# Altium PCB SoM.PcbDoc (part 2 of 5)
Units mm, origin at the board's own origin, x right, y up, seen from the top; angles counter-clockwise.
Board outline 69.6 x 50 mm, 8 copper layers ([1] Signal HS-H, [2] GND, [3] Signal HS-V, [4] GND, [5] POWER, [6] Signal H, [7] GND, [8] Signal V), stack 1.601 mm thick; 537 components, 538 nets, 5734 pads, 0 vias.
Unrouted connection lines stored in the file: 2195.
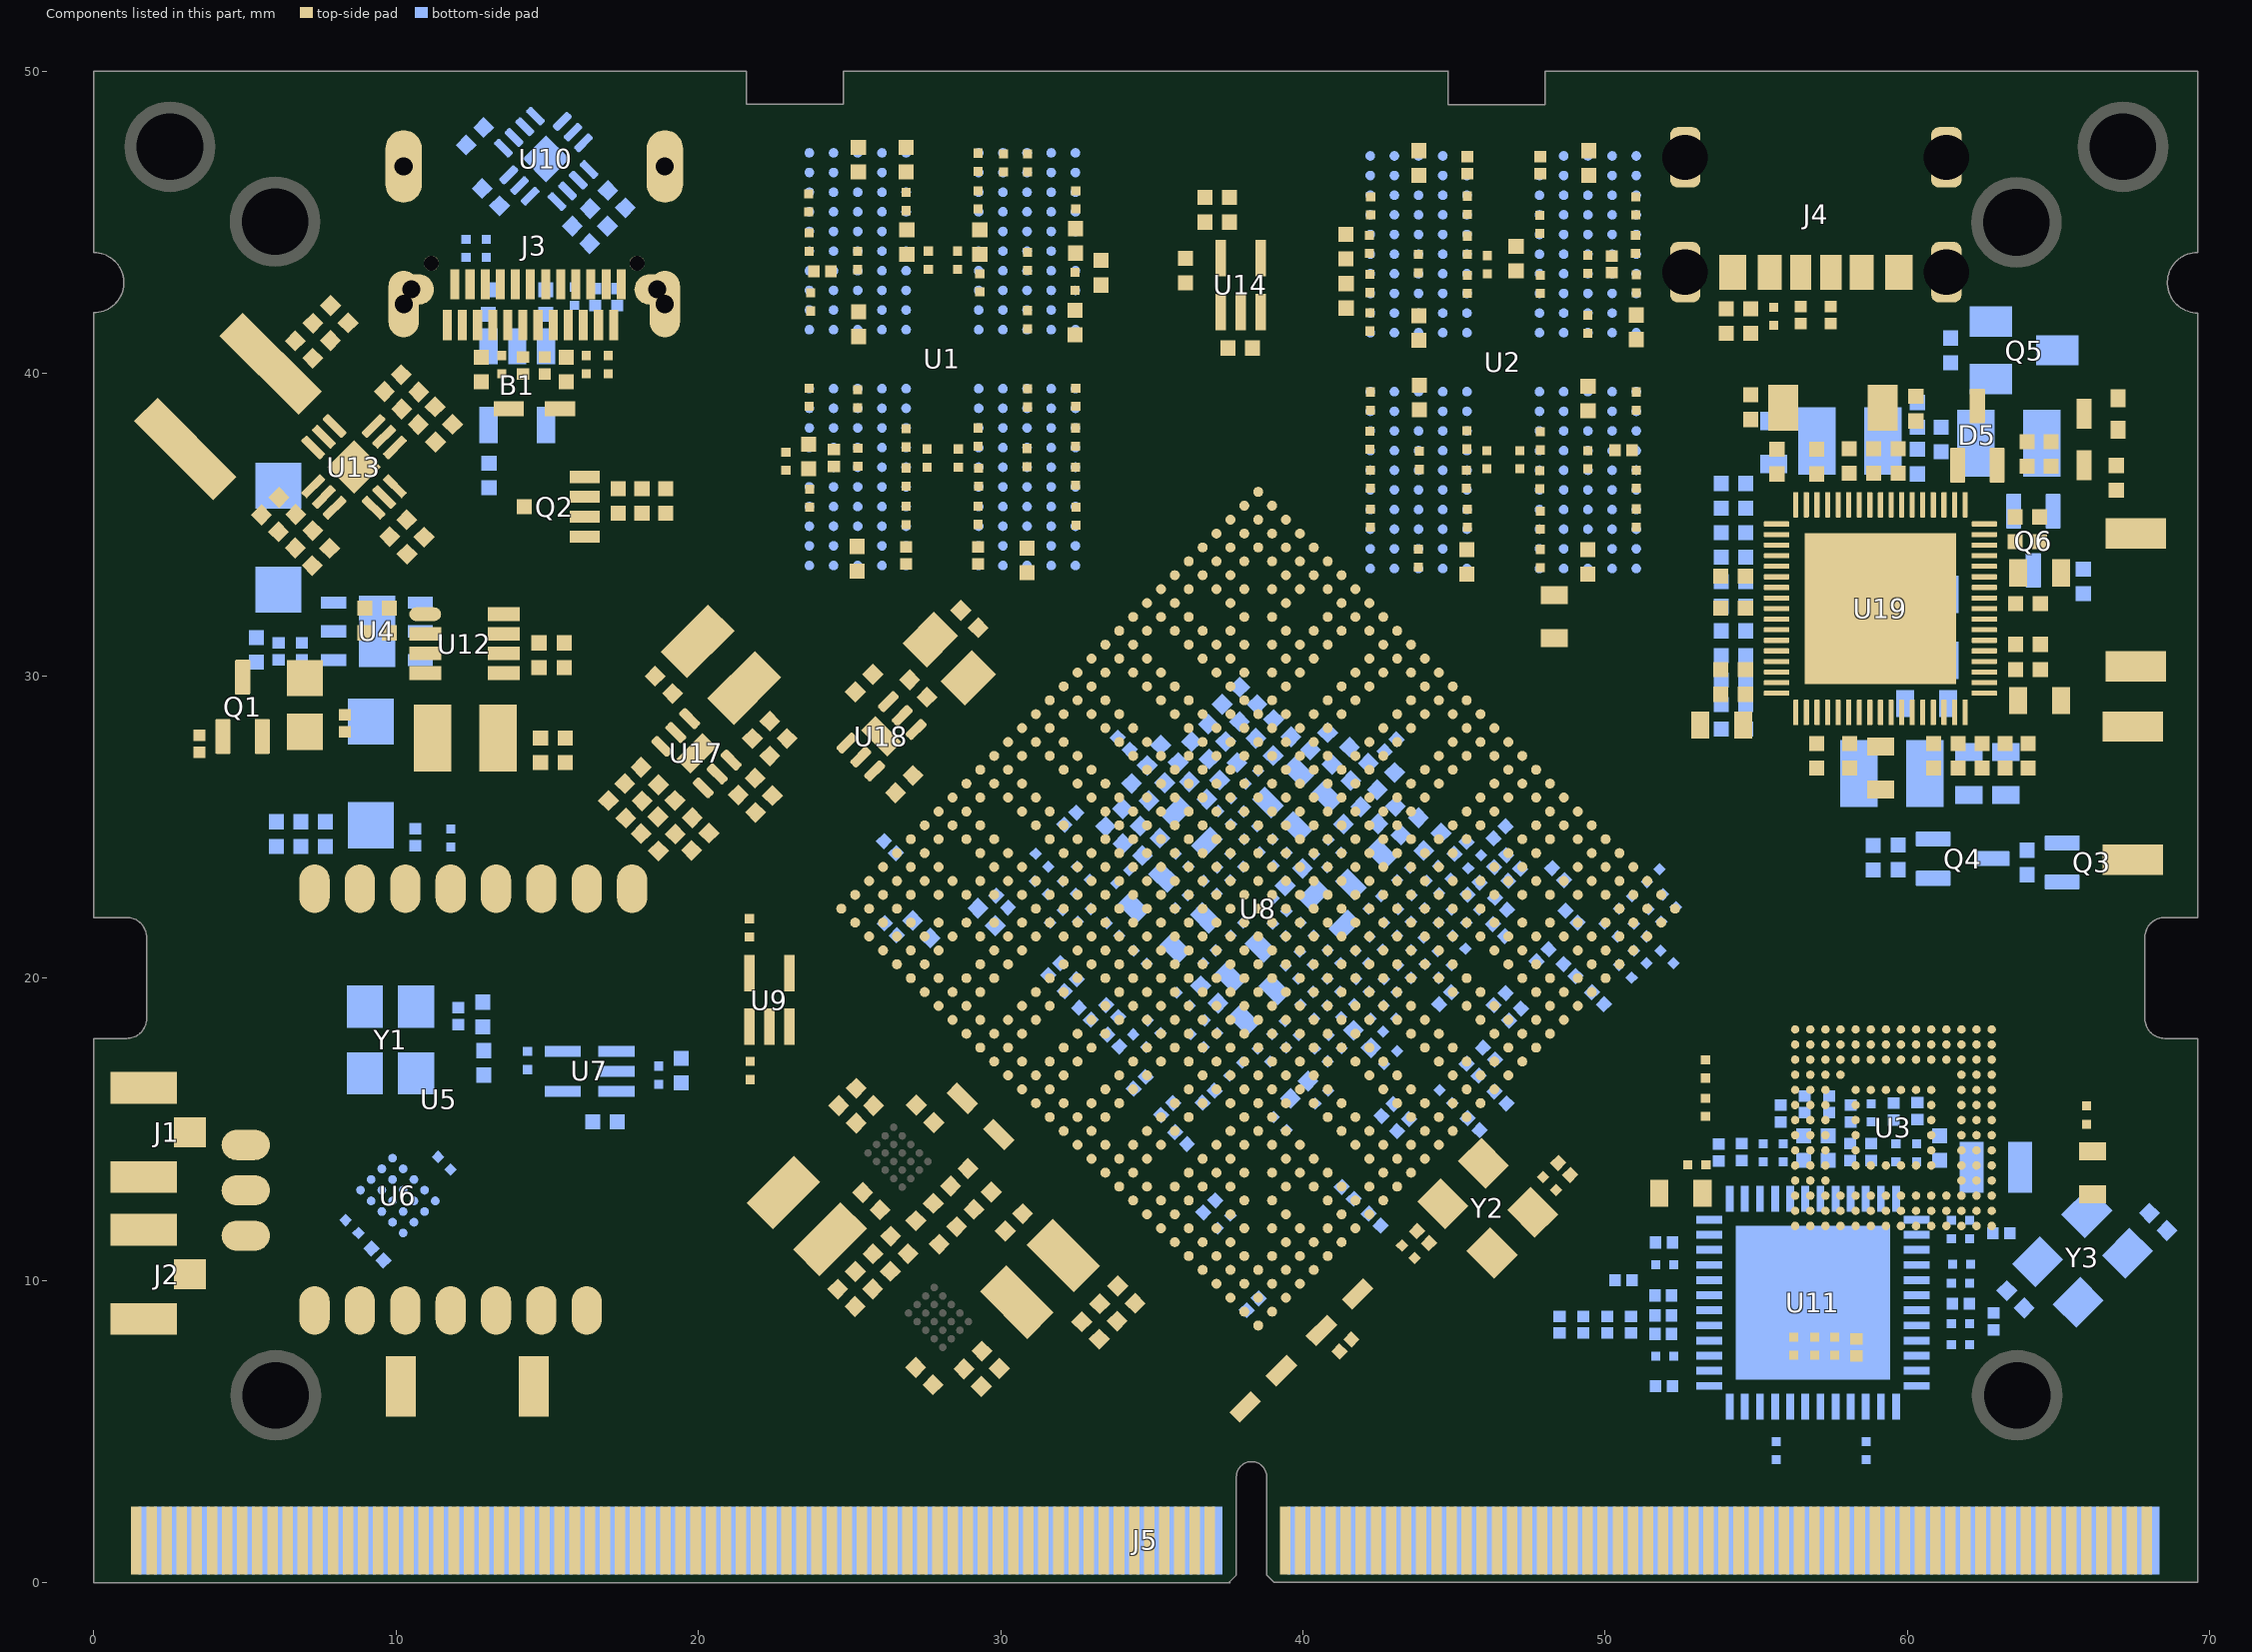
[diagram p8: the components of this part, seen from the top]

## Footprints (in the part's own frame and the unit in brackets; to place one, negate y for a bottom-side part, rotate by r counter-clockwise, add the part's x,y. Pads: shape width x height; smd on the part's side, far side on the other; paste and mask are expansions set on the pad) (continued)
FBGA828_23_826X826 [mm] "RK3399"
  round 0.33 smd: A1(-9.75,9.75) A2(-9.1,9.75) A3(-8.45,9.75) A4(-7.8,9.75) A5(-7.15,9.75) A6(-6.5,9.75) A7(-5.85,9.75) A8(-5.2,9.75) A9(-4.55,9.75) A10(-3.9,9.75) A11(-3.25,9.75) A12(-2.6,9.75) A13(-1.95,9.75) A14(-1.3,9.75) A15(-0.65,9.75) A16(0,9.75) A17(0.65,9.75) A18(1.3,9.75) A19(1.95,9.75) A20(2.6,9.75) A21(3.25,9.75) A22(3.9,9.75) A23(4.55,9.75) A24(5.2,9.75) A25(5.85,9.75) A26(6.5,9.75) A27(7.15,9.75) A28(7.8,9.75) A29(8.45,9.75) A30(9.1,9.75) A31(9.75,9.75) AA1(-9.75,-3.25) AA2(-9.1,-3.25) AA3(-8.45,-3.25) AA4(-7.8,-3.25) AA5(-7.15,-3.25) AA6(-6.5,-3.25) AA7(-5.85,-3.25) AA8(-5.2,-3.25) AA9(-4.55,-3.25) AA10(-3.9,-3.25) AA11(-3.25,-3.25) AA12(-2.6,-3.25) AA13(-1.95,-3.25) AA14(-1.3,-3.25) AA15(-0.65,-3.25) AA16(0,-3.25) AA17(0.65,-3.25) AA18(1.3,-3.25) AA19(1.95,-3.25) AA20(2.6,-3.25) AA21(3.25,-3.25) AA22(3.9,-3.25) AA23(4.55,-3.25) AA24(5.2,-3.25) AA25(5.85,-3.25) AA26(6.5,-3.25) AA27(7.15,-3.25) AA28(7.8,-3.25) AA29(8.45,-3.25) AA30(9.1,-3.25) AA31(9.75,-3.25) AB1(-9.75,-3.9) AB2(-9.1,-3.9) AB8(-5.2,-3.9) AB9(-4.55,-3.9) AB10(-3.9,-3.9) AB11(-3.25,-3.9) AB12(-2.6,-3.9) AB13(-1.95,-3.9) AB14(-1.3,-3.9) AB15(-0.65,-3.9) AB16(0,-3.9) AB17(0.65,-3.9) AB18(1.3,-3.9) AB19(1.95,-3.9) AB20(2.6,-3.9) AB21(3.25,-3.9) AB22(3.9,-3.9) AB23(4.55,-3.9) AB24(5.2,-3.9) AB30(9.1,-3.9) AB31(9.75,-3.9) AC1(-9.75,-4.55) AC2(-9.1,-4.55) AC3(-8.45,-4.55) AC4(-7.8,-4.55) AC5(-7.15,-4.55) AC6(-6.5,-4.55) AC7(-5.85,-4.55) AC8(-5.2,-4.55) AC9(-4.55,-4.55) AC10(-3.9,-4.55) AC11(-3.25,-4.55) AC12(-2.6,-4.55) AC13(-1.95,-4.55) AC14(-1.3,-4.55) AC15(-0.65,-4.55) AC16(0,-4.55) AC17(0.65,-4.55) AC18(1.3,-4.55) AC19(1.95,-4.55) AC20(2.6,-4.55) AC21(3.25,-4.55) AC22(3.9,-4.55) AC23(4.55,-4.55) AC24(5.2,-4.55) AC25(5.85,-4.55) AC26(6.5,-4.55) AC27(7.15,-4.55) AC28(7.8,-4.55) AC29(8.45,-4.55) AC30(9.1,-4.55) AC31(9.75,-4.55) AD1(-9.75,-5.2) AD2(-9.1,-5.2) AD3(-8.45,-5.2) AD4(-7.8,-5.2) AD5(-7.15,-5.2) AD6(-6.5,-5.2) AD7(-5.85,-5.2) AD8(-5.2,-5.2) AD9(-4.55,-5.2) AD10(-3.9,-5.2) AD11(-3.25,-5.2) AD12(-2.6,-5.2) AD13(-1.95,-5.2) AD14(-1.3,-5.2) AD15(-0.65,-5.2) AD16(0,-5.2) AD17(0.65,-5.2) AD18(1.3,-5.2) AD19(1.95,-5.2) AD20(2.6,-5.2) AD21(3.25,-5.2) AD22(3.9,-5.2) AD23(4.55,-5.2) AD24(5.2,-5.2) AD25(5.85,-5.2) AD26(6.5,-5.2) AD27(7.15,-5.2) AD28(7.8,-5.2) AD29(8.45,-5.2) AD30(9.1,-5.2) AD31(9.75,-5.2) AE1(-9.75,-5.85) AE2(-9.1,-5.85) AE5(-7.15,-5.85) AE6(-6.5,-5.85) AE8(-5.2,-5.85) AE9(-4.55,-5.85) AE11(-3.25,-5.85) AE12(-2.6,-5.85) AE14(-1.3,-5.85) AE15(-0.65,-5.85) AE17(0.65,-5.85) AE18(1.3,-5.85) AE20(2.6,-5.85) AE21(3.25,-5.85) AE23(4.55,-5.85) AE24(5.2,-5.85) AE26(6.5,-5.85) AE27(7.15,-5.85) AE30(9.1,-5.85) AE31(9.75,-5.85) AF1(-9.75,-6.5) AF2(-9.1,-6.5) AF3(-8.45,-6.5) AF4(-7.8,-6.5) AF5(-7.15,-6.5) AF7(-5.85,-6.5) AF8(-5.2,-6.5) AF9(-4.55,-6.5) AF11(-3.25,-6.5) AF12(-2.6,-6.5) AF14(-1.3,-6.5) AF15(-0.65,-6.5) AF17(0.65,-6.5) AF18(1.3,-6.5) AF20(2.6,-6.5) AF21(3.25,-6.5) AF23(4.55,-6.5) AF24(5.2,-6.5) AF25(5.85,-6.5) AF27(7.15,-6.5) AF28(7.8,-6.5) AF29(8.45,-6.5) AF30(9.1,-6.5) AF31(9.75,-6.5) AG1(-9.75,-7.15) AG2(-9.1,-7.15) AG3(-8.45,-7.15) AG4(-7.8,-7.15) AG6(-6.5,-7.15) AG7(-5.85,-7.15) AG8(-5.2,-7.15) AG9(-4.55,-7.15) AG11(-3.25,-7.15) AG12(-2.6,-7.15) AG14(-1.3,-7.15) AG15(-0.65,-7.15) AG17(0.65,-7.15) AG18(1.3,-7.15) AG20(2.6,-7.15) AG21(3.25,-7.15) AG23(4.55,-7.15) AG24(5.2,-7.15) AG25(5.85,-7.15) AG26(6.5,-7.15) AG28(7.8,-7.15) AG29(8.45,-7.15) AG30(9.1,-7.15) AG31(9.75,-7.15) AH1(-9.75,-7.8) AH2(-9.1,-7.8) AH3(-8.45,-7.8) AH5(-7.15,-7.8) AH6(-6.5,-7.8) AH8(-5.2,-7.8) AH9(-4.55,-7.8) AH11(-3.25,-7.8) AH12(-2.6,-7.8) AH14(-1.3,-7.8) AH15(-0.65,-7.8) AH17(0.65,-7.8) AH18(1.3,-7.8) AH20(2.6,-7.8) AH21(3.25,-7.8) AH23(4.55,-7.8) AH24(5.2,-7.8) AH26(6.5,-7.8) AH27(7.15,-7.8) AH29(8.45,-7.8) AH30(9.1,-7.8) AH31(9.75,-7.8) AJ1(-9.75,-8.45) AJ2(-9.1,-8.45) AJ3(-8.45,-8.45) AJ4(-7.8,-8.45) AJ5(-7.15,-8.45) AJ6(-6.5,-8.45) AJ8(-5.2,-8.45) AJ9(-4.55,-8.45) AJ11(-3.25,-8.45) AJ12(-2.6,-8.45) AJ14(-1.3,-8.45) AJ15(-0.65,-8.45) AJ17(0.65,-8.45) AJ18(1.3,-8.45) AJ20(2.6,-8.45) AJ21(3.25,-8.45) AJ23(4.55,-8.45) AJ24(5.2,-8.45) AJ26(6.5,-8.45) AJ27(7.15,-8.45) AJ28(7.8,-8.45) AJ29(8.45,-8.45) AJ30(9.1,-8.45) AJ31(9.75,-8.45) AK1(-9.75,-9.1) AK2(-9.1,-9.1) AK3(-8.45,-9.1) AK4(-7.8,-9.1) AK5(-7.15,-9.1) AK6(-6.5,-9.1) AK7(-5.85,-9.1) AK8(-5.2,-9.1) AK9(-4.55,-9.1) AK10(-3.9,-9.1) AK11(-3.25,-9.1) AK12(-2.6,-9.1) AK13(-1.95,-9.1) AK14(-1.3,-9.1) AK15(-0.65,-9.1) AK16(0,-9.1) AK17(0.65,-9.1) AK18(1.3,-9.1) AK19(1.95,-9.1) AK20(2.6,-9.1) AK21(3.25,-9.1) AK22(3.9,-9.1) AK23(4.55,-9.1) AK24(5.2,-9.1) AK25(5.85,-9.1) AK26(6.5,-9.1) AK27(7.15,-9.1) AK28(7.8,-9.1) AK29(8.45,-9.1) AK30(9.1,-9.1) AK31(9.75,-9.1) AL1(-9.75,-9.75) AL2(-9.1,-9.75) AL3(-8.45,-9.75) AL4(-7.8,-9.75) AL5(-7.15,-9.75) AL6(-6.5,-9.75) AL7(-5.85,-9.75) AL8(-5.2,-9.75) AL9(-4.55,-9.75) AL10(-3.9,-9.75) AL11(-3.25,-9.75) AL12(-2.6,-9.75) AL13(-1.95,-9.75) AL14(-1.3,-9.75) AL15(-0.65,-9.75) AL16(0,-9.75) AL17(0.65,-9.75) AL18(1.3,-9.75) AL19(1.95,-9.75) AL20(2.6,-9.75) AL21(3.25,-9.75) AL22(3.9,-9.75) AL23(4.55,-9.75) AL24(5.2,-9.75) AL25(5.85,-9.75) AL26(6.5,-9.75) AL27(7.15,-9.75) AL28(7.8,-9.75) AL29(8.45,-9.75) AL30(9.1,-9.75) AL31(9.75,-9.75) B1(-9.75,9.1) B2(-9.1,9.1) B3(-8.45,9.1) B4(-7.8,9.1) B5(-7.15,9.1) B6(-6.5,9.1) B7(-5.85,9.1) B8(-5.2,9.1) B9(-4.55,9.1) B10(-3.9,9.1) B11(-3.25,9.1) B12(-2.6,9.1) B13(-1.95,9.1) B14(-1.3,9.1) B15(-0.65,9.1) B16(0,9.1) B17(0.65,9.1) B18(1.3,9.1) B19(1.95,9.1) B20(2.6,9.1) B21(3.25,9.1) B22(3.9,9.1) B23(4.55,9.1) B24(5.2,9.1) B25(5.85,9.1) B26(6.5,9.1) B27(7.15,9.1) B28(7.8,9.1) B29(8.45,9.1) B30(9.1,9.1) B31(9.75,9.1) C1(-9.75,8.45) C2(-9.1,8.45) C3(-8.45,8.45) C4(-7.8,8.45) C5(-7.15,8.45) C6(-6.5,8.45) C8(-5.2,8.45) C9(-4.55,8.45) C11(-3.25,8.45) C12(-2.6,8.45) C14(-1.3,8.45) C15(-0.65,8.45) C17(0.65,8.45) C18(1.3,8.45) C20(2.6,8.45) C21(3.25,8.45) C23(4.55,8.45) C24(5.2,8.45) C26(6.5,8.45) C27(7.15,8.45) C28(7.8,8.45) C29(8.45,8.45) C30(9.1,8.45) C31(9.75,8.45) D1(-9.75,7.8) D2(-9.1,7.8) D3(-8.45,7.8) D5(-7.15,7.8) D6(-6.5,7.8) D8(-5.2,7.8) D9(-4.55,7.8) D11(-3.25,7.8) D12(-2.6,7.8) D14(-1.3,7.8) D15(-0.65,7.8) D17(0.65,7.8) D18(1.3,7.8) D20(2.6,7.8) D21(3.25,7.8) D23(4.55,7.8) D24(5.2,7.8) D26(6.5,7.8) D27(7.15,7.8) D29(8.45,7.8) D30(9.1,7.8) D31(9.75,7.8) E1(-9.75,7.15) E2(-9.1,7.15) E3(-8.45,7.15) E4(-7.8,7.15) E6(-6.5,7.15) E7(-5.85,7.15) E8(-5.2,7.15) E9(-4.55,7.15) E11(-3.25,7.15) E12(-2.6,7.15) E14(-1.3,7.15) E15(-0.65,7.15) E17(0.65,7.15) E18(1.3,7.15) E20(2.6,7.15) E21(3.25,7.15) E23(4.55,7.15) E24(5.2,7.15) E25(5.85,7.15) E26(6.5,7.15) E28(7.8,7.15) E29(8.45,7.15) E30(9.1,7.15) E31(9.75,7.15) F1(-9.75,6.5) F2(-9.1,6.5) F3(-8.45,6.5) F4(-7.8,6.5) F5(-7.15,6.5) F7(-5.85,6.5) F8(-5.2,6.5) F9(-4.55,6.5) F11(-3.25,6.5) F12(-2.6,6.5) F14(-1.3,6.5) F15(-0.65,6.5) F17(0.65,6.5) F18(1.3,6.5) F20(2.6,6.5) F21(3.25,6.5) F23(4.55,6.5) F24(5.2,6.5) F25(5.85,6.5) F27(7.15,6.5) F28(7.8,6.5) F29(8.45,6.5) F30(9.1,6.5) F31(9.75,6.5) G1(-9.75,5.85) G2(-9.1,5.85) G5(-7.15,5.85) G6(-6.5,5.85) G8(-5.2,5.85) G9(-4.55,5.85) G11(-3.25,5.85) G12(-2.6,5.85) G14(-1.3,5.85) G15(-0.65,5.85) G17(0.65,5.85) G18(1.3,5.85) G20(2.6,5.85) G21(3.25,5.85) G23(4.55,5.85) G24(5.2,5.85) G26(6.5,5.85) G27(7.15,5.85) G30(9.1,5.85) G31(9.75,5.85) H1(-9.75,5.2) H2(-9.1,5.2) H3(-8.45,5.2) H4(-7.8,5.2) H5(-7.15,5.2) H6(-6.5,5.2) H7(-5.85,5.2) H9(-4.55,5.2) H10(-3.9,5.2) H11(-3.25,5.2) H12(-2.6,5.2) H13(-1.95,5.2) H14(-1.3,5.2) H15(-0.65,5.2) H16(0,5.2) H17(0.65,5.2) H18(1.3,5.2) H19(1.95,5.2) H20(2.6,5.2) H21(3.25,5.2) H22(3.9,5.2) H23(4.55,5.2) H24(5.2,5.2) H25(5.85,5.2) H26(6.5,5.2) H27(7.15,5.2) H28(7.8,5.2) H29(8.45,5.2) H30(9.1,5.2) H31(9.75,5.2) J1(-9.75,4.55) J2(-9.1,4.55) J3(-8.45,4.55) J4(-7.8,4.55) J5(-7.15,4.55) J6(-6.5,4.55) J7(-5.85,4.55) J8(-5.2,4.55) J9(-4.55,4.55) J10(-3.9,4.55) J11(-3.25,4.55) J12(-2.6,4.55) J13(-1.95,4.55) J14(-1.3,4.55) J15(-0.65,4.55) J16(0,4.55) J17(0.65,4.55) J18(1.3,4.55) J19(1.95,4.55) J20(2.6,4.55) J21(3.25,4.55) J22(3.9,4.55) J23(4.55,4.55) J24(5.2,4.55) J25(5.85,4.55) J26(6.5,4.55) J27(7.15,4.55) J28(7.8,4.55) J29(8.45,4.55) J30(9.1,4.55) J31(9.75,4.55) K1(-9.75,3.9) K2(-9.1,3.9) K8(-5.2,3.9) K9(-4.55,3.9) K10(-3.9,3.9) K11(-3.25,3.9) K12(-2.6,3.9) K13(-1.95,3.9) K14(-1.3,3.9) K15(-0.65,3.9) K16(0,3.9) K17(0.65,3.9) K18(1.3,3.9) K19(1.95,3.9) K20(2.6,3.9) K21(3.25,3.9) K22(3.9,3.9) K23(4.55,3.9) K24(5.2,3.9) K30(9.1,3.9) K31(9.75,3.9) L1(-9.75,3.25) L2(-9.1,3.25) L3(-8.45,3.25) L4(-7.8,3.25) L5(-7.15,3.25) L6(-6.5,3.25) L7(-5.85,3.25) L8(-5.2,3.25) L9(-4.55,3.25) L10(-3.9,3.25) L11(-3.25,3.25) L12(-2.6,3.25) L13(-1.95,3.25) L14(-1.3,3.25) L15(-0.65,3.25) L16(0,3.25) L17(0.65,3.25) L18(1.3,3.25) L19(1.95,3.25) L20(2.6,3.25) L21(3.25,3.25) L22(3.9,3.25) L23(4.55,3.25) L24(5.2,3.25) L25(5.85,3.25) L26(6.5,3.25) L27(7.15,3.25) L28(7.8,3.25) L29(8.45,3.25) L30(9.1,3.25) L31(9.75,3.25) M1(-9.75,2.6) M2(-9.1,2.6) M3(-8.45,2.6) M4(-7.8,2.6) M5(-7.15,2.6) M6(-6.5,2.6) M7(-5.85,2.6) M8(-5.2,2.6) M9(-4.55,2.6) M10(-3.9,2.6) M11(-3.25,2.6) M12(-2.6,2.6) M13(-1.95,2.6) M14(-1.3,2.6) M15(-0.65,2.6) M16(0,2.6) M17(0.65,2.6) M18(1.3,2.6) M19(1.95,2.6) M20(2.6,2.6) M21(3.25,2.6) M22(3.9,2.6) M23(4.55,2.6) M24(5.2,2.6) M25(5.85,2.6) M26(6.5,2.6) M27(7.15,2.6) M28(7.8,2.6) M29(8.45,2.6) M30(9.1,2.6) M31(9.75,2.6) N1(-9.75,1.95) N2(-9.1,1.95) N8(-5.2,1.95) N9(-4.55,1.95) N10(-3.9,1.95) N11(-3.25,1.95) N12(-2.6,1.95) N13(-1.95,1.95) N14(-1.3,1.95) N15(-0.65,1.95) N16(0,1.95) N17(0.65,1.95) N18(1.3,1.95) N19(1.95,1.95) N20(2.6,1.95) N21(3.25,1.95) N22(3.9,1.95) N23(4.55,1.95) N24(5.2,1.95) N30(9.1,1.95) N31(9.75,1.95) P1(-9.75,1.3) P2(-9.1,1.3) P3(-8.45,1.3) P4(-7.8,1.3) P5(-7.15,1.3) P6(-6.5,1.3) P7(-5.85,1.3) P8(-5.2,1.3) P9(-4.55,1.3) P10(-3.9,1.3) P11(-3.25,1.3) P12(-2.6,1.3) P13(-1.95,1.3) P14(-1.3,1.3) P15(-0.65,1.3) P16(0,1.3) P17(0.65,1.3) P18(1.3,1.3) P19(1.95,1.3) P20(2.6,1.3) P21(3.25,1.3) P22(3.9,1.3) P23(4.55,1.3) P24(5.2,1.3) P25(5.85,1.3) P26(6.5,1.3) P27(7.15,1.3) P28(7.8,1.3) P29(8.45,1.3) P30(9.1,1.3) P31(9.75,1.3) R1(-9.75,0.65) R2(-9.1,0.65) R3(-8.45,0.65) R4(-7.8,0.65) R5(-7.15,0.65) R6(-6.5,0.65) R7(-5.85,0.65) R8(-5.2,0.65) R9(-4.55,0.65) R10(-3.9,0.65) R11(-3.25,0.65) R12(-2.6,0.65) R13(-1.95,0.65) R14(-1.3,0.65) R15(-0.65,0.65) R16(0,0.65) R17(0.65,0.65) R18(1.3,0.65) R19(1.95,0.65) R20(2.6,0.65) R21(3.25,0.65) R22(3.9,0.65) R23(4.55,0.65) R24(5.2,0.65) R25(5.85,0.65) R26(6.5,0.65) R27(7.15,0.65) R28(7.8,0.65) R29(8.45,0.65) R30(9.1,0.65) R31(9.75,0.65) T1(-9.75,0) T2(-9.1,0) T8(-5.2,0) T9(-4.55,0) T10(-3.9,0) T11(-3.25,0) T12(-2.6,0) T13(-1.95,0) T14(-1.3,0) T15(-0.65,0) T16(0,0) T17(0.65,0) T18(1.3,0) T19(1.95,0) T20(2.6,0) T21(3.25,0) T22(3.9,0) T23(4.55,0) T24(5.2,0) T30(9.1,0) T31(9.75,0) U1(-9.75,-0.65) U2(-9.1,-0.65) U3(-8.45,-0.65) U4(-7.8,-0.65) U5(-7.15,-0.65) U6(-6.5,-0.65) U7(-5.85,-0.65) U8(-5.2,-0.65) U9(-4.55,-0.65) U10(-3.9,-0.65) U11(-3.25,-0.65) U12(-2.6,-0.65) U13(-1.95,-0.65) U14(-1.3,-0.65) U15(-0.65,-0.65) U16(0,-0.65) U17(0.65,-0.65) U18(1.3,-0.65) U19(1.95,-0.65) U20(2.6,-0.65) U21(3.25,-0.65) U22(3.9,-0.65) U23(4.55,-0.65) U24(5.2,-0.65) U25(5.85,-0.65) U26(6.5,-0.65) U27(7.15,-0.65) U28(7.8,-0.65) U29(8.45,-0.65) U30(9.1,-0.65) U31(9.75,-0.65) V1(-9.75,-1.3) V2(-9.1,-1.3) V3(-8.45,-1.3) V4(-7.8,-1.3) V5(-7.15,-1.3) V6(-6.5,-1.3) V7(-5.85,-1.3) V8(-5.2,-1.3) V9(-4.55,-1.3) V10(-3.9,-1.3) V11(-3.25,-1.3) V12(-2.6,-1.3) V13(-1.95,-1.3) V14(-1.3,-1.3) V15(-0.65,-1.3) V16(0,-1.3) V17(0.65,-1.3) V18(1.3,-1.3) V19(1.95,-1.3) V20(2.6,-1.3) V21(3.25,-1.3) V22(3.9,-1.3) V23(4.55,-1.3) V24(5.2,-1.3) V25(5.85,-1.3) V26(6.5,-1.3) V27(7.15,-1.3) V28(7.8,-1.3) V29(8.45,-1.3) V30(9.1,-1.3) V31(9.75,-1.3) W1(-9.75,-1.95) W2(-9.1,-1.95) W8(-5.2,-1.95) W9(-4.55,-1.95) W10(-3.9,-1.95) W11(-3.25,-1.95) W12(-2.6,-1.95) W13(-1.95,-1.95) W14(-1.3,-1.95) W15(-0.65,-1.95) W16(0,-1.95) W17(0.65,-1.95) W18(1.3,-1.95) W19(1.95,-1.95) W20(2.6,-1.95) W21(3.25,-1.95) W22(3.9,-1.95) W23(4.55,-1.95) W24(5.2,-1.95) W30(9.1,-1.95) W31(9.75,-1.95) Y1(-9.75,-2.6) Y2(-9.1,-2.6) Y3(-8.45,-2.6) Y4(-7.8,-2.6) Y5(-7.15,-2.6) Y6(-6.5,-2.6) Y7(-5.85,-2.6) Y8(-5.2,-2.6) Y9(-4.55,-2.6) Y10(-3.9,-2.6) Y11(-3.25,-2.6) Y12(-2.6,-2.6) Y13(-1.95,-2.6) Y14(-1.3,-2.6) Y15(-0.65,-2.6) Y16(0,-2.6) Y17(0.65,-2.6) Y18(1.3,-2.6) Y19(1.95,-2.6) Y20(2.6,-2.6) Y21(3.25,-2.6) Y22(3.9,-2.6) Y23(4.55,-2.6) Y24(5.2,-2.6) Y25(5.85,-2.6) Y26(6.5,-2.6) Y27(7.15,-2.6) Y28(7.8,-2.6) Y29(8.45,-2.6) Y30(9.1,-2.6) Y31(9.75,-2.6)
  silkscreen extent -11.57,-11.57 11.58,11.58, body extent -10.51,-10.51 10.51,10.51, height 1.61
IND_62.9_110X86.6_SMD [mm] "Inductor"
  rect 0.8x1.7 smd: 1(-0.8,0) 2(0.8,0)
  silkscreen extent -1.4,-1.1 1.4,1.1, body extent -0.79,-0.84 0.84,0.84, height 1.2
IND_0805 [mm] "Inductor"
  rect 1.14x1.47 smd: 1(-0.89,0) 2(0.89,0)
  silkscreen extent -1.71,-0.98 1.71,0.98, body extent -1.05,-0.79 1.05,0.79, height 0.9
IND_1008 [mm] "Inductor"
  rect 1.24x2.22 smd: 1(-1.09,0) 2(1.09,0)
  silkscreen extent -1.96,-1.36 1.96,1.36, body extent -1.46,-1.39 1.46,1.4, height 2.01
IND_1616 [mm] "Inductor"
  rect 1.1x3.7 smd: 1(-1.994,0) 2(1.994,0)
  silkscreen extent -2.81,-2.1 2.78,2.1, body extent -2.23,-2.09 2.21,2.04, height 1.26
LED_0805 [mm] "LED"
  rect 1.2x1.2 smd mask+0.076: A(0.889,0) K(-0.889,0)
  silkscreen extent -1.99,-0.89 1.73,0.89, body extent -1.01,-0.62 1.01,0.63, height 1.1
MLP-14_98.4X98.4_SMD [mm] "MLP Package"
  rrect50% 0.7x0.26 smd mask+0.076: 1(-1.25,0.5) 2(-1.25,0) 3(-1.25,-0.5) 8(1.25,-0.5) 9(1.25,0) 10(1.25,0.5)
  rrect50% 0.26x0.7 smd mask+0.076: 4(-0.75,-1.25) 5(-0.25,-1.25) 6(0.25,-1.25) 7(0.75,-1.25) 11(0.75,1.25) 12(0.25,1.25) 13(-0.25,1.25) 14(-0.75,1.25)
  rect 1.1x1.1 smd paste-2 mask+0.076: 15(0,0)
  silkscreen extent -2.23,-1.85 1.85,1.85, body extent -1.3,-1.3 1.3,1.3, height 0.8
MOD_WF60 [mm] "17-Leads, Body 13.50x14.60mm, Pitch 1.50mm, IPC Medium Density"
  oval 1.6x1 smd: 1(-6.975,5.25) 2(-6.975,3.75) 3(-6.975,2.25) 4(-6.975,0.75) 5(-6.975,-0.75) 6(-6.975,-2.25) 7(-6.975,-3.75) 8(6.975,-5.25) 9(6.975,-3.75) 10(6.975,-2.25) 11(6.975,-0.75) 12(6.975,0.75) 13(6.975,2.25) 14(6.975,3.75) 15(6.975,5.25)
  oval 1x1.6 smd: 16(-1.5,7.525) 17(-3,7.525) 18(-4.5,7.525)
  silkscreen extent -8.03,-8.58 8.03,8.57, body extent -6.76,-7.31 6.76,7.31, height 2.7
NFBGA_31.4_125.9X102.36 [mm] "BGA, 20-Leads, Body 3.00x2.50mmx0.80mm, Pitch 0.50mm"
  round 0.29 smd: A1(-1,0.75) A2(-1,0.25) A3(-1,-0.25) A4(-1,-0.75) B1(-0.5,0.75) B2(-0.5,0.25) B3(-0.5,-0.25) B4(-0.5,-0.75) C1(0,0.75) C2(0,0.25) C3(0,-0.25) C4(0,-0.75) D1(0.5,0.75) D2(0.5,0.25) D3(0.5,-0.25) D4(0.5,-0.75) E1(1,0.75) E2(1,0.25) E3(1,-0.25) E4(1,-0.75)
  silkscreen extent -1.95,-1.5 1.75,1.5, body extent -1.5,-1.25 1.5,1.25, height 0.8
PowerPAK_1212-8_SMD [mm] "Mosfet"
  rect 0.99x0.405 smd: 1(-0.996,0.99) 2(-0.996,0.33) 3(-0.996,-0.33) 4(-0.996,-0.99)
  rect 0.5x0.5 smd paste-1 mask+0: 5(0.996,0)
  [1] Signal HS-H region: 2.369,0.787 1.859,0.787 1.859,0.533 2.369,0.533 2.369,0.128 1.859,0.128 1.859,-0.128 2.369,-0.128 2.369,-0.533 1.859,-0.533 1.859,-0.787 2.369,-0.787 2.369,-1.195 1.609,-1.195 1.609,-1.118 0.134,-1.118 0.134,1.118 1.609,1.118 1.609,1.195 2.369,1.195
  silkscreen extent -2.16,-1.9 2.62,1.9, body extent -1.16,-1.68 2.14,1.62, height 1.05
QFN48_19.6_324X324_SMD [mm] "QFN Package"
  rect 0.86x0.26 smd: 1(-3.435,2.75) 2(-3.435,2.25) 3(-3.435,1.75) 4(-3.435,1.25) 5(-3.435,0.75) 6(-3.435,0.25) 7(-3.435,-0.25) 8(-3.435,-0.75) 9(-3.435,-1.25) 10(-3.435,-1.75) 11(-3.435,-2.25) 12(-3.435,-2.75) 25(3.435,-2.75) 26(3.435,-2.25) 27(3.435,-1.75) 28(3.435,-1.25) 29(3.435,-0.75) 30(3.435,-0.25) 31(3.435,0.25) 32(3.435,0.75) 33(3.435,1.25) 34(3.435,1.75) 35(3.435,2.25) 36(3.435,2.75)
  rect 0.26x0.86 smd: 13(-2.75,-3.435) 14(-2.25,-3.435) 15(-1.75,-3.435) 16(-1.25,-3.435) 17(-0.75,-3.435) 18(-0.25,-3.435) 19(0.25,-3.435) 20(0.75,-3.435) 21(1.25,-3.435) 22(1.75,-3.435) 23(2.25,-3.435) 24(2.75,-3.435) 37(2.75,3.435) 38(2.25,3.435) 39(1.75,3.435) 40(1.25,3.435) 41(0.75,3.435) 42(0.25,3.435) 43(-0.25,3.435) 44(-0.75,3.435) 45(-1.25,3.435) 46(-1.75,3.435) 47(-2.25,3.435) 48(-2.75,3.435)
  rect 5.1x5.1 smd: 49(0,0)
  silkscreen extent -4.12,-4.12 4.12,4.12
QFN68_13.7_220.4X220.4_SMD [mm] "QFN Package"
  rrect25% 0.84x0.17 smd mask+0.076: 1(-3.435,2.8) 2(-3.435,2.45) 3(-3.435,2.1) 4(-3.435,1.75) 5(-3.435,1.4) 6(-3.435,1.05) 7(-3.435,0.7) 8(-3.435,0.35) 9(-3.435,0) 10(-3.435,-0.35) 11(-3.435,-0.7) 12(-3.435,-1.05) 13(-3.435,-1.4) 14(-3.435,-1.75) 15(-3.435,-2.1) 16(-3.435,-2.45) 17(-3.435,-2.8) 35(3.435,-2.8) 36(3.435,-2.45) 37(3.435,-2.1) 38(3.435,-1.75) 39(3.435,-1.4) 40(3.435,-1.05) 41(3.435,-0.7) 42(3.435,-0.35) 43(3.435,0) 44(3.435,0.35) 45(3.435,0.7) 46(3.435,1.05) 47(3.435,1.4) 48(3.435,1.75) 49(3.435,2.1) 50(3.435,2.45) 51(3.435,2.8)
  rrect25% 0.17x0.84 smd mask+0.076: 18(-2.8,-3.435) 19(-2.45,-3.435) 20(-2.1,-3.435) 21(-1.75,-3.435) 22(-1.4,-3.435) 23(-1.05,-3.435) 24(-0.7,-3.435) 25(-0.35,-3.435) 26(0,-3.435) 27(0.35,-3.435) 28(0.7,-3.435) 29(1.05,-3.435) 30(1.4,-3.435) 31(1.75,-3.435) 32(2.1,-3.435) 33(2.45,-3.435) 34(2.8,-3.435) 52(2.8,3.435) 53(2.45,3.435) 54(2.1,3.435) 55(1.75,3.435) 56(1.4,3.435) 57(1.05,3.435) 58(0.7,3.435) 59(0.35,3.435) 60(0,3.435) 61(-0.35,3.435) 62(-0.7,3.435) 63(-1.05,3.435) 64(-1.4,3.435) 65(-1.75,3.435) 66(-2.1,3.435) 67(-2.45,3.435) 68(-2.8,3.435)
  rect 5x5 smd paste-4 mask+0.076: 69(0,0)
  silkscreen extent -4.11,-4.11 4.11,4.11, body extent -3.5,-3.51 3.51,3.51, height 1.3
QFN-12_19_118X118_SMD [mm] "QFN Package"
  rrect25% 0.89x0.27 smd: 1(-1.41,0.5) 2(-1.41,0) 3(-1.41,-0.5) 7(1.41,-0.5) 8(1.41,0) 9(1.41,0.5)
  rrect25% 0.27x0.89 smd: 4(-0.5,-1.41) 5(0,-1.41) 6(0.5,-1.41) 10(0.5,1.41) 11(0,1.41) 12(-0.5,1.41)
  rect 1.25x1.25 smd paste-2: 13(0,0)
  silkscreen extent -2.1,-2.1 2.1,2.11, body extent -1.5,-1.5 1.5,1.5, height 1
RES_0201 [mm]
  rect 0.38x0.4 smd: 1(-0.28,0) 2(0.28,0)
  silkscreen extent -0.64,-0.36 0.64,0.36, body extent -0.34,-0.16 0.34,0.17, height 0.35
RES_0402 [mm]
  rect 0.5x0.5 smd mask+0.051: 1(-0.406,0) 2(0.406,0)
  silkscreen extent -0.76,-0.36 0.76,0.36, body extent -0.5,-0.25 0.5,0.25, height 0.3
SC70-5 [mil]
  rect 47.24x14 smd: 1(-35,26) 2(-35,0) 3(-35,-26) 4(35,-26) 5(35,26)
  silkscreen extent -69,-49 69,59, body extent -41,-39 41,39, height 37
SOT23-8 [mm] "Case-SOT"
  oval 1.05x0.45 smd mask+0.076: 1(-1.3,0.975)
  rect 1.05x0.45 smd mask+0.076: 2(-1.3,0.325) 3(-1.3,-0.325) 4(-1.3,-0.975) 5(1.3,-0.975) 6(1.3,-0.325) 7(1.3,0.325) 8(1.3,0.975)
  silkscreen extent -2.28,-1.62 1.35,1.65, body extent -1.45,-1.47 1.5,1.48, height 1.1
SOT95P285X140-5N [mm]
  rect 1.2x0.6 smd: 1(-1.3,0.95) 2(-1.3,0) 3(-1.3,-0.95) 4(1.3,-0.95) 5(1.3,0.95)
  silkscreen extent -1.9,-1.47 0.35,1.5, body extent -1.42,-1.47 1.43,1.48, height 1.4
"SOT 23-3" [mm] "Case: SOT23"
  rect 1.4x1 smd paste+0 mask+0.076: 1(1.1,-0.95) 2(1.1,0.95) 3(-1.1,0)
  silkscreen extent -1.12,-1.6 0.18,1.6, body extent -1.5,-1.5 1.5,1.5, height 1.3
SOT-323-3 [mm] "SOT Package"
  rrect13% 1.15x0.5 smd: 1(-0.98,0.65) 2(-0.98,-0.65) 3(0.98,0)
  silkscreen extent -1.24,-1.11 0.68,1.5, body extent -1.12,-1.1 1.12,1.1, height 1.11
SW_177_39.3X77.7_SMD [mm] "SMD Switch"
  rect 1x2 smd: 1(-2.2,0) 2(2.2,0)
  silkscreen extent -3.1,-1.5 3.1,1.6, body extent -2.1,-1.2 1.9,1.3, height 1.61
WDFN-6_26_133X100_SMD [mm] "SMD Package"
  rrect50% 0.76x0.31 smd: 1(-0.97,0.65) 2(-0.97,0) 3(-0.97,-0.65) 4(0.97,-0.65) 5(0.97,0) 6(0.97,0.65)
  rect 0.675x1.225 smd paste-2: 7(0,0)
  silkscreen extent -2,-1.28 1.6,1.28, body extent -1,-1 1,1, height 0.8
XTAL_57_35X31_SMD [mm] "Crystal"
  rect 1.4x1.2 smd: 1(0,0) 2(2.2,0) 3(2.2,1.7) 4(0,1.7)
  silkscreen extent -1.5,-0.91 3.2,2.62
XTAL_ABM8AIG-24.000MHZ-12-2Z-T3 [mm] "Crystal"
  rect 1.3x1.1 smd: 1(-1.15,-0.95) 2(1.15,-0.95) 3(1.15,0.95) 4(-1.15,0.95)
  silkscreen extent -2.08,-2.18 2.08,1.73, body extent -1.25,-1 1.25,1, height 0.81
XTAL_ECS-.327-6-34RR-TR [mm] "Crystal"
  rect 1x1.524 smd: 1(-1.648,0) 2(1.648,0)
  silkscreen extent -2.35,-0.97 2.35,1, body extent -1.65,-0.75 1.85,0.75, height 0.9

## Part data
B1: "Power Switch ICs - Power Distribution", Manufacturer_Name="Olimex Ltd.", Manufacturer_Part_Number="SMD IC SY6280AAC", Mouser Part Number=909-SMDICSY6280AAC, Geometry.Height=1.4mm, Mouser Price/Stock=https://www.mouser.co.uk/ProductDetail/Olimex-Ltd/SMD-IC-SY6280AAC?qs=9vOqFld9vZUuwGiRcx8i5w%3D%3D
C1 C4 C19 C28 C37 C46 C55 C64 C73 C82 C160 C169 C270 C271 C277 C278 C285 C288 C292 C293 C294 C295 C296 C297 C298 C304: library part CAP_22uF-6.3V-20%-0402, "22µF ±20% 6.3V Ceramic Capacitor X5R 0402 (1005 Metric)", Case/Package=0402, Manufacturer="Murata Electronics", Manufacturer Part Number=CL05A226MQ5N6J8, Supplier-1=Digikey
C2 C11 C20 C29 C38 C47 C56 C65 C74 C83 C161 C170 C243 C261 C265 C267 C268 C274 C275 C300 C302 C305 C347: library part CAP_10uF-10V-20%-0402, "10µF ±20% 10V Ceramic Capacitor X5R 0402 (1005 Metric)", Case/Package=0402, Manufacturer="Samsung Electro-Mechanics", Manufacturer Part Number=CL05A106MP5NUNC, Supplier-1=Digikey
C3 C12 C21 C30 C39 C48 C57 C66 C75 C84 C108 C109 C111 C112 C117 C118 C119 C122 C123 C124 C130 C131 C132 C133 C134 C140 C141 C142 C143 C185 C186 C192 C193 C205 C207 C245 C256: library part CAP_1uF-16V-10%-0201, "1µF ±20% 16V Ceramic Capacitor X5R 0201 (0603 Metric)", Case/Package=0201, Manufacturer="Samsung Electro-Mechanics", Manufacturer Part Number=CL03A105MO3NRNH, Supplier-1=Digikey
C5 C6 C7 C8 C9 C10 C13 C14 C15 C16 C17 C18 C22 C23 C24 C25 C26 C27 C31 C32 C33 C34 C35 C36 C40 C41 C42 C43 C44 C45 C49 C50 C51 C52 C53 C54 C58 C59 C60 C61 C62 C63 C67 C68 C69 C70 C71 C72 C76 C77 C78 C79 C80 C81 C85 C86 C87 C88 C89 C90 C99 C101 C102 C106 C107 C110 C113 C120 C121 C125 C135 C144 C154 C178 C181 C182 C183 C184 C187 C188 C189 C190 C194 C195 C196 C197 C198 C199 C200 C201 C202 C203 C204 C206 C208 C209 C210 C211 C212 C213 C214 C215 C216 C217 C218 C219 C220 C221 C222 C223 C224 C225 C226 C227 C228 C229 C230 C237 C238 C239 C240 C242 C244 C246 C247 C248 C249 C250 C251 C254 C257 C258 C259 C260 C262 C279: library part CAP_100nF-25V-10%-0201, "0.1µF ±10% 25V Ceramic Capacitor X5R 0201 (0603 Metric)", Case/Package=0201, Manufacturer="TDK Corporation", Manufacturer Part Number=C0603X5R1E104K030BB, Supplier-1=Digikey
C91 C96: library part CAP-P_10uF-16V-10%-1206, "10µF Molded Tantalum Capacitors 16V 1206 (3216 Metric) 3Ohm", Alternate Part Number-1=CA45-A016K106T, Case/Package=1206, Manufacturer="AVX Corporation", Manufacturer Part Number=TAJA106K016SNJ, Category=Capacitor, Number of Pins=2, Supplier Part Number-1=TAJA106K016SNJ, Supplier-1=SIRICOM
C92: library part CAP_4.7uF-6.3V-20%-0201, "4.7µF ±20% 6.3V Ceramic Capacitor X5R 0201 (0603 Metric)", Case/Package=0201, Manufacturer="Murata Electronics", Manufacturer Part Number=GRM035R60J475ME15D, Supplier-1=Digikey
C93 C276: library part CAP_4.7uF-10V-10%-0402, "4.7µF ±10% 10V Ceramic Capacitor X5R 0402 (1005 Metric)", Case/Package=0402, Manufacturer="Samsung Electro-Mechanics", Manufacturer Part Number=CL05A475KP5NRNC, Supplier-1=Digikey
C94 C231 C272 C273 C282 C283 C286 C287 C289 C290 C291 C299 C307 C308: library part CAP_100nF-25V-10%-0402, "0.1µF ±10% 25V Ceramic Capacitor X7R 0402 (1005 Metric)", Case/Package=0402, Manufacturer="Walsin Technology Corporation", Manufacturer Part Number=0402B104K250CT, Supplier-1=Digikey
C95 C98 C241: library part CAP_10nF-10V-10%-0402, "10000pF ±10% 10V Ceramic Capacitor X7R 0402 (1005 Metric)", Case/Package=0402, Manufacturer="AVX Corporation", Manufacturer Part Number=0402ZC103KAT2A, Supplier-1=Digikey
C97: library part CAP_1nF-10V-10%-0402, "1000pF ±10% 10V Ceramic Capacitor X7R 0402 (1005 Metric)", Case/Package=0402, Manufacturer=KEMET, Manufacturer Part Number=C0402C102K8RACTU, Supplier-1=Digikey
C100 C104 C105 C116 C139: library part CAP_10uF-25V-10%-0603, "10µF ±10% 25V Ceramic Capacitor X5R 0603 (1608 Metric)", Case/Package=0603, Manufacturer="Murata Electronics", Manufacturer Part Number=GRM188R61E106KA73D, Supplier-1=Digikey
C103 C127 C128 C129 C138 C146 C309 C310 C311 C312 C317 C318 C319 C320 C322 C323: library part CAP_22uF-10V-20%-0603, "22µF ±20% 10V Ceramic Capacitor X5R 0603 (1608 Metric)", Case/Package=0603, Manufacturer="Murata Electronics", Manufacturer Part Number=GRM188R61A226ME15D, Supplier-1=Digikey
C114 C126 C136 C137 C145 C155 C156 C157 C158 C159 C191: library part CAP_1nF-16V-10%-0201, "1000pF ±10% 16V Ceramic Capacitor X7R 0201 (0603 Metric)", Case/Package=0201, Manufacturer="Murata Electronics", Manufacturer Part Number=GRM033R71C102KA01D, Supplier-1=Digikey
C162 C171 C232 C233 C234 C281 C284 C329 C330 C331 C332 C333 C334 C335 C336 C339: library part CAP_1uF-10V-10%-0402, "1µF ±10% 10V Ceramic Capacitor X6S 0402 (1005 Metric)", Case/Package=0402, Manufacturer="Murata Electronics", Manufacturer Part Number=GRT155C81A105KE01D, Supplier-1=Digikey
C163 C164 C165 C166 C167 C168 C172 C173 C174 C175 C176 C177 C266 C301 C303 C328 C342 C344 C345 C346: library part CAP_100nF-10V-10%-0402, "0.1µF ±10% 10V Ceramic Capacitor X7R 0402 (1005 Metric)", Case/Package=0402, Manufacturer=Yageo, Manufacturer Part Number=CC0402KRX7R6BB104, Supplier-1=Digikey
C179 C180: library part CAP_12pF-16V-10%-0201, "12pF ±10% 16V Ceramic Capacitor C0G, NP0 0201 (0603 Metric)", Case/Package=0201, Manufacturer="AVX Corporation", Manufacturer Part Number=0201YA120KAT2A, Supplier-1=Digikey
C235 C236: library part CAP_220pF-10V-10%-0402, "220pF ±10% 10V Ceramic Capacitor X7R 0402 (1005 Metric)", Case/Package=0402, Manufacturer=KEMET, Manufacturer Part Number=C0402C221K8RAC7867, Supplier-1=Digikey
C252 C253 C280 C340: library part CAP_1uF-16V-10%-0402, "1µF ±10% 16V Ceramic Capacitor X5R 0402 (1005 Metric)", Case/Package=0402, Manufacturer="Knowles Novacap", Manufacturer Part Number=0402BW105K160YT, Supplier-1=Digikey
C255: library part CAP_4.7nF-10V-10%-0201, "4700pF ±10% 10V Ceramic Capacitor X7R 0201 (0603 Metric)", Case/Package=0201, Manufacturer="AVX Corporation", Manufacturer Part Number=0201ZC472KAT2A, Supplier-1=Digikey
C263 C264: library part CAP_12pF-10V-10%-0402, "12pF ±10% 10V Ceramic Capacitor X8R 0402 (1005 Metric)", Case/Package=0402, Manufacturer=KEMET, Manufacturer Part Number=C0402C120K8HAC7867, Supplier-1=Digikey
C269: library part CAP_220nF-10V-10%-0402, "0.22µF ±10% 10V Ceramic Capacitor X7R 0402 (1005 Metric)", Case/Package=0402, Manufacturer="Samsung Electro-Mechanics", Manufacturer Part Number=CL05B224KP5NNNC, Supplier-1=Digikey
C306: library part CAP_22nF-10V-10%-0402, "0.022µF ±10% 10V Ceramic Capacitor X7R 0402 (1005 Metric)", Case/Package=0402, Manufacturer="Samsung Electro-Mechanics", Manufacturer Part Number=CL05B223KP5NNNC, Supplier-1=Digikey
C313 C314 C315 C316 C324 C325 C326 C327 C337 C338: library part CAP_2.2uF-10V-10%-0402, "2.2µF ±10% 10V Ceramic Capacitor X5R 0402 (1005 Metric)", Case/Package=0402, Manufacturer="Murata Electronics", Manufacturer Part Number=GRM155R61A225KE95D, Supplier-1=Digikey
C321: library part CAP_47pF-10V-10%-0402, "47pF ±10% 10V Ceramic Capacitor C0G, NP0 0402 (1005 Metric)", Case/Package=0402, Manufacturer=KEMET, Manufacturer Part Number=C0402C470K8GAC7867, Supplier-1=Supplier-1
C341 C343: library part CAP_22pF-10V-10%-0402, "22pF ±10% 10V Ceramic Capacitor C0G, NP0 0402 (1005 Metric)", Case/Package=0402, Manufacturer=KEMET, Manufacturer Part Number=C0402C220K8GACTU, Supplier-1=Digikey
D1 D2 D3 D4: library part DIO-Z_3.3V-300mW-SOD-523, "Zener Diode 3.3V 300mW ±6% Surface Mount SOD-523", Case/Package=SOD523, Manufacturer="Diodes Incorporated", Manufacturer Part Number=BZT52C3V3T-7, Supplier-1=Digikey
D5: library part DIO-S-A_30V-200mA-SOT-323, "Diode Array 1 Pair Common Cathode Schottky 30V 200mA (DC) Surface Mount SC-70, SOT-323", Case/Package=SOT323, Manufacturer="ON Semiconductor", Manufacturer Part Number=BAT54CWT1G, Supplier-1=Digikey
D6: library part DIO_75V-200mA-SOD-523F, "Diode Standard 100V 300mA (DC) Surface Mount SOD-123", Case/Package=SOD123, Manufacturer=FAIRCHILD, Manufacturer Part Number=1N4148WT, Supplier-1=SIRICOM
D7: library part DIO-T_10V-39V-0402, "39V Varistor 1 Circuit Surface Mount, MLCV 0402 (1005 Metric)", Case/Package=0402, Manufacturer="TDK Corporation", Manufacturer Part Number=AVRL101A1R1NTB, Supplier-1=Digikey
DS1: library part LED_RED-2V-20mA-0805, "Red 631nm LED Indication - Discrete 2V 0805 (2012 Metric)", Case/Package=0805, Manufacturer="Vishay Lite-On", Manufacturer Part Number=LTST-C171KRKT, Supplier-1="SP ROAD"
FB1 FB2 FB3 FB4 FB5 FB6 FB7 FB8 FB9 FB10: library part FB_120R-1.3A-100Mhz-0402, "120 Ohms @ 100MHz 1 Power Line Ferrite Bead 0402 (1005 Metric) 1.3A 90mOhm", Case/Package=0402, Manufacturer="Murata Electronics", Mnaufacturer Part Number=BLM15PD121SN1D, Supplier-1=Digikey
J1 J2: library part CON-PLG_3X1-ECT818000071-ST-SMD, "SMD RF Connectors/Coaxial Connectors RoHS", Case/Package=SMD, Manufacturer=ECT, Manufacturer Part Number=ECT818000071, Supplier-1=LCSC
J3: library part CON-TYPEC_U262-241N-4BV64-SMD, "USB - Type C Female 24 SMD USB Connectors RoHS", Case/Package=SMD, Manufacturer="XKB Connectivity", Manufacturer Part Number=U262-241N-4BV64, Supplier-1=LCSC
J4: library part CON-TYPEC_6X1-100-RA-TH, "USB Connectors USB jack, C type, power only, 6 pin, horizonal, gold flash plating, surface mount, T&R", Case/Package=TH, Manufacturer="CUI Devices", Manufacturer Part Number=UJC-HP-3-SMT-TR, Supplier-1=Mouser
J5: library part CON-DIMM_260-SMD, "Dimm 260 pin smd plating on pcb", Case/Package=NA, Manufacturer=NA, Manufacturer Part Number=NA, Supplier-1=NA
L1: library part IND_4.7uH-0.9A-20%-SMD, "4.7uH ±20% 900mA 425mΩ SMD,2.0x1.6x1.0mm Power Inductors RoHS", Case/Package=SMD, Manufacturer=Sunlord, Manufacturer Part Number=WPN201610H4R7MT, Supplier-1=LCSC
L2 L4 L6 L8 L9 L10 L11: library part IND_1uH-3.8A-20%-1008, "1µH Shielded Wirewound Inductor 3.8A 54mOhm Max 1008 (2520 Metric)", Case/Package=1008, Manufacturer="Murata Electronics", Manufacturer Part Number=DFE252010P-1R0M=P2, Supplier-1=Digikey
L3: library part IND_1.5uH-6A-20%-SMD, "Wire Wound SMD Power Inductors – WPN Series / Operating Temp. : -40℃~+125℃ (Including self-heating)", Case/Package=SMD, Manufacturer=Sunlord, Mnaufcaturer Part Number=WPN4020H1R5MT, Supplier-1=NA
L5: library part IND_470nH-5A-20%-1008, "470nH Shielded Wirewound Inductor 5A 35mOhm Max 1008 (2520 Metric)", Case/Package=1008, Manufacturer="Murata Electronics", Manufacturer Part Number=DFE252010P-R47M=P2, Supplier-1=Digikey
L7: library part IND_1uF-0.5A-20%-0805, "1uH ±20% 500mA 150mΩ 0805 Inductors (SMD) RoHS", Case/Package=0805, Manufacturer="Taiyo Yuden", Manufacturer Part Number=CB2012T1R0M, Supplier-1=LCSC
Q1 Q6: library part MOSFET-N_20V-820mA-SOT-323, "N Channel 20V 820mA 850mV @ 250uA 310mΩ @ 550mA,4.5V 310mW SOT-323(SC-70) MOSFET RoHS", Case/Package=SOT-323(SC-70), Manufacturer="WILLSEMI(Will Semicon)", Manufacturer Part Number=WNM2021-3/TR, Supplier-1=LCSC
Q2: library part MOSFET-P_20V-35A-1212-8, "P-Channel 20V 35A (Tc) 33W (Tc) Surface Mount PowerPAK® 1212-8", Case/Package="PowerPAK® 1212-8", Manufacturer="Vishay Siliconix", Manufacturer Part Number=SI7615CDN-T1-GE3, Supplier-1=Digikey
Q3: library part MOSFET-P_50V-130mA-SOT-323, "P-Channel 50V 130mA (Ta) 200mW (Ta) Surface Mount SOT-323", Case/Package=SOT-323, Manufacturer="Diodes Incorporated", Manufacturer Part Number=BSS84W-7-F, Supplier-1=Digikey
Q4: library part TRAN-NPN_40V-200mA-SOT323, "Bipolar (BJT) Transistor NPN 40V 200mA 300MHz 150mW Surface Mount SC-70-3 (SOT323)", Case/Package=SOT323, Manufacturer="ON Semiconductor", Manufacturer Part Number=MMBT3904WT1G, Supplier-1=Digikey
Q5: library part MOSFET-N_20V-2.9A-SOT-23, "N Channel 20V 2.9A 1V @ 250uA 47mΩ @ 3.6A,4.5V 700mW SOT-23(SOT-23-3) MOSFET RoHS", Case/Package=SOT-23(SOT-23-3), Manufacturer="WILLSEMI(Will Semicon)", Manufacturer Part Number=WNM2016-3/TR, Supplier-1=LCSC
R1 R2 R3 R4 R9 R10 R12 R14 R15 R18 R26 R30: library part RES_10K-0.05W-1%-0201, "10 kOhms ±1% 0.05W, 1/20W Chip Resistor 0201 (0603 Metric) Thick Film", Case/Package=0201, Manufacturer="Stackpole Electronics Inc", Manufacturer Part Number=RMCF0201FT10K0, Supplier-1=Digikey
R5 R6 R7 R8 R69 R70 R77 R78: library part RES_0R-0.05W-1%-0201, "0 Ohms Jumper 0.05W, 1/20W Chip Resistor 0201 (0603 Metric) Automotive AEC-Q200 Thick Film", Case/Package=0201, Manufacturer="Bourns Inc.", Manufacturer Part Number=CR0201AJ/-000GLF, Supplier-1=Digikey
R11: library part RES_40.2K-0.05W-1%-0201, "40.2 kOhms ±1% 0.05W, 1/20W Chip Resistor 0201 (0603 Metric) Automotive AEC-Q200, Moisture Resistant Thick Film", Case/Package=0201, Manufacturer=Yageo, Manufacturer Part Number=AC0201FR-0740K2L, Supplier-1=Digikey
R13 R52 R53 R63: library part RES_1K-0.1W-1%-0402, "1 kOhms ±1% 0.1W, 1/10W Chip Resistor 0402 (1005 Metric) Anti-Sulfur Thin Film", Case/Package=0402, Manufacturer="Vishay Beyschlag/Draloric/BC Components", Manufacturer Part Number=MCS04020C1001FE000, Supplier-1=Digikey
R16 R115: library part RES_47K-0.1W-1%-0402, "47 kOhms ±1% 0.1W, 1/10W Chip Resistor 0402 (1005 Metric) Automotive AEC-Q200 Thick Film", Case/Package=0402, Manufacturer="Panasonic Electronic Components", Manufacturer Part Number=ERJ-2RKF4702X, Supplier-1=Digikey
R17: library part RES_120K-0.1W-1%-0402, "120 kOhms ±1% 0.1W, 1/10W Chip Resistor 0402 (1005 Metric) Anti-Sulfur Thin Film", Case/Package=0402, Manufacturer="Vishay Beyschlag/Draloric/BC Components", Manufacturer Part Number=MCS04020C1203FE000, Supplier-1=Digikey
R19 R20: library part RES_240R-0.05W-1%-0201, "240 Ohms ±1% 0.05W, 1/20W Chip Resistor 0201 (0603 Metric) Thick Film", Case/Package=0201, Manufacturer=Yageo, Manufacturer Part Number=RC0201FR-07240RL, Supplier-1=Digikey
R21: library part RES_1M-0.05W-1%-0201, "1 MOhms ±1% 0.05W, 1/20W Chip Resistor 0201 (0603 Metric) Thick Film", Case/Package=0201, Manufacturer=Yageo, Manufacturer Part Number=RC0201FR-071ML, Supplier-1=Digikey
R22 R24 R74 R76 R79: library part RES_33R-0.05W-1%-0201, "33 Ohms ±1% 0.05W, 1/20W Chip Resistor 0201 (0603 Metric) Thick Film", Case/Package=0201, Manufacturer=Yageo, Manufacturer Part Number=RC0201FR-0733RL, Supplier-1=Digikey
R23 R36 R38 R47 R48 R93: library part RES_1K-0.05W-1%-0201, "1 kOhms ±1% 0.05W, 1/20W Chip Resistor 0201 (0603 Metric) Thick Film", Case/Package=0201, Manufacturer=Yageo, Manufacturer Part Number=RC0201FR-071KL, Supplier-1=Digikey
R25 R46 R49 R50 R51 R54 R55 R56: library part RES_22R-0.05W-1%-0201, "22 Ohms ±1% 0.05W, 1/20W Chip Resistor 0201 (0603 Metric) Moisture Resistant Thick Film", Case/Package=0201, Manufacturer=Yageo, Manufacturer Part Number=RC0201FR-0722RL, Supplier-1=Digikey
R27: library part RES_100R-0.05W-1%-0201, "100 kOhms ±1% 0.05W, 1/20W Chip Resistor 0201 (0603 Metric) Automotive AEC-Q200 Thick Film", Case/Package=0201, Manufacturer="Panasonic Electronic Components", Manufacturer Part Number=ERJ-1GNF1003C, Supplier-1=Digikey
R28: library part RES_1.62K-0.05W-1%-0201, "1.62 kOhms ±1% 0.05W, 1/20W Chip Resistor 0201 (0603 Metric) Automotive AEC-Q200 Thick Film", Case/Package=0201, Manufacturer="Panasonic Electronic Components", Manufacturer Part Number=ERJ-1GNF1621C, Supplier-1=Digikey
R29: library part RES_6.04K-0.05W-1%-0201, "6.04 kOhms ±1% 0.05W, 1/20W Chip Resistor 0201 (0603 Metric) Thick Film", Case/Package=0201, Manufacturer="Panasonic Electronic Components", Manufacturer Part Number=ERJ-1GEF6041C, Supplier-1=Digikey
R31 R40 R41: library part RES_4.02K-0.05W-1%-0201, "4.02 kOhms ±1% 0.05W, 1/20W Chip Resistor 0201 (0603 Metric) Thick Film", Case/Package=0201, Manufacturer=Yageo, Manufacturer Part Number=RC0201FR-074K02L, Supplier-1=Digikey
R32 R33 R34 R35: library part RES_499R-0.05W-1%-0201, "499 Ohms ±1% 0.05W, 1/20W Chip Resistor 0201 (0603 Metric) Thick Film", Case/Package=0201, Manufacturer="Stackpole Electronics Inc", Manufacturer Part Number=RMCF0201FT499R, Supplier-1=Digikey
R37 R39: library part RES_133R-0.05W-1%-0201, "133 Ohms ±1% 0.05W, 1/20W Chip Resistor 0201 (0603 Metric) Automotive AEC-Q200 Thick Film", Case/Package=0201, Manufacturer="Panasonic Electronic Components", Manufacturer Part Number=ERJ-1GNF1330C, Supplier-1=Digikey
R42 R43 R44 R45 R57 R58 R59 R60 R61 R62: library part RES_2.2K-0.05W-1%-0201, "2.2 kOhms ±1% 0.05W, 1/20W Chip Resistor 0201 (0603 Metric) Thick Film", Case/Package=0201, Manufacturer="Stackpole Electronics Inc", Manufacturer Part Number=RMCF0201FT2K20, Supplier-1=Digikey
R64: library part RES_3.4K-0.1W-1%-0402, "3.4 kOhms ±1% 0.1W, 1/10W Chip Resistor 0402 (1005 Metric) Automotive AEC-Q200 Thick Film", Case/Package=0402, Manufacturer="Panasonic Electronic Components", Manufacturer Part Number=ERJ-2RKF3401X, Supplier-1=Digikey
R65 R66: library part RES_2M-0.05W-1%-0201, "2 MOhms ±1% 0.05W, 1/20W Chip Resistor 0201 (0603 Metric) Thick Film", Case/Package=0201, Manufacturer=Yageo, Manufacturer Part Number=RC0201FR-072ML, Supplier-1=Digikey
R67 R68: library part RES_100K-0.05W-1%-0201, "100 kOhms ±1% 0.05W, 1/20W Chip Resistor 0201 (0603 Metric) Automotive AEC-Q200 Thick Film", Case/Package=0201, Manufacturer="Panasonic Electronic Components", Manufacturer Part Number=ERJ-1GNF1003C, Supplier-1=Digikey
R71 R72 R73 R80 R81 R82 R83 R84 R85 R86 R87 R88 R89 R91 R92: library part RES_4.7K-0.1W-1%-0201, "4.02 kOhms ±1% 0.05W, 1/20W Chip Resistor 0201 (0603 Metric) Thick Film", Case/Package=0201, Manufacturer=Yageo, Manufacturer Part Number=RC0201FR-074K02L, Supplier-1=Digikey
R75: library part RES_2.49K-0.05W-1%-0201, "2.49 kOhms ±1% 0.05W, 1/20W Chip Resistor 0201 (0603 Metric) Automotive AEC-Q200 Thick Film", Case/Package=0201, Manufacturer="Panasonic Electronic Components", Manufacturer Part Number=ERJ-1GNF2491C, Supplier-1=Digikey
R90: library part RES_1.1K-0.05W-1%-0201, "1.1 kOhms ±1% 0.05W, 1/20W Chip Resistor 0201 (0603 Metric) Automotive AEC-Q200 Thick Film", Case/Package=0201, Manufacturer="Panasonic Electronic Components", Manufacturer Part Number=ERJ-1GNF1101C, Supplier-1=Digikey
R94: library part RES_30K-0.1W-1%-0402, "30 kOhms ±1% 0.1W, 1/10W Chip Resistor 0402 (1005 Metric) Automotive AEC-Q200, Moisture Resistant Thick Film", Case/Package=0402, Manufacturer="KOA Speer Electronics, Inc.", Manufacturer Part Number=RK73H1ETTP3002F, Supplier-1=Digikey
R95: library part RES_6.8K-0.1W-1%-0402, "6.8 kOhms ±1% 0.1W, 1/10W Chip Resistor 0402 (1005 Metric) Anti-Sulfur Thin Film", Case/Package=0402, Manufacturer="Vishay Beyschlag/Draloric/BC Components", Manufacturer Part Number=MCS04020C6801FE000, Supplier-1=Digikey
R96: library part RES_3.3R-0.1W-1%-0402, "3.3 Ohms ±1% 0.1W, 1/10W Chip Resistor 0402 (1005 Metric) Anti-Sulfur, Automotive AEC-Q200 Thick Film", Case/Package=0402, Manufacturer="Panasonic Electronic Components", Manufacturer Part Number=ERJ-U02F3R30X, Supplier-1=Digikey
R97 R98 R104 R110 R111 R112 R130: library part RES_100K-0.1W-1%-0402, "100 kOhms ±1% 0.1W, 1/10W Chip Resistor 0402 (1005 Metric) Anti-Sulfur Thin Film", Case/Package=0402, Manufacturer="Vishay Beyschlag/Draloric/BC Components", Manufacturer Part Number=MCS04020C1003FE000, Supplier-1=Digikey
R99 R114 R116 R121: library part RES_200K-0.1W-1%-0402, "200 kOhms ±1% 0.1W, 1/10W Chip Resistor 0402 (1005 Metric) Automotive AEC-Q200 Thick Film", Case/Package=0402, Manufacturer="Panasonic Electronic Components", Manufacturer Part Number=ERJ-2RKF2003X, Supplier-1=Digikey
R100 R103 R105 R106 R109 R113 R124 R125 R126: library part RES_10K-0.1W-1%-0402, "10 kOhms ±1% 0.1W, 1/10W Chip Resistor 0402 (1005 Metric) Anti-Sulfur Thin Film", Case/Package=0402, Manufacturer="Vishay Beyschlag/Draloric/BC Components", Manufacturer Part Number=MCS04020C1002FE000, Supplier-1=Digikey
R101 R102: library part RES_5.6K-0.05W-1%-0201, "5.6 kOhms ±1% 0.05W, 1/20W Chip Resistor 0201 (0603 Metric) Automotive AEC-Q200 Thick Film", Case/Package=0201, Manufacturer="Panasonic Electronic Components", Manufacturer Part Number=ERJ-1GNF5601C, Supplier-1=Digikey
R107 R108 R127 R128: library part RES_100R-0.1W-1%-0402, "100 Ohms ±1% 0.1W, 1/10W Chip Resistor 0402 (1005 Metric) Automotive AEC-Q200, Moisture Resistant Thick Film", Case/Package=0402, Manufacturer="KOA Speer Electronics, Inc.", Manufacturer Part Number=RK73H1ETTP1000F, Supplier-1=Digikey
R117: library part RES_39K-0.1W-1%-0402, "39 kOhms ±1% 0.1W, 1/10W Chip Resistor 0402 (1005 Metric) Automotive AEC-Q200, Moisture Resistant Thick Film", Case/Package=0402, Manufacturer="KOA Speer Electronics, Inc.", Manufacturer Part Number=RK73H1ETTP3902F, Supplier-1=Digikey
R118: library part RES_118K-0.1W-1%-0402, "118 kOhms ±1% 0.1W, 1/10W Chip Resistor 0402 (1005 Metric) Automotive AEC-Q200, Moisture Resistant Thick Film", Case/Package=0402, Manuafcturer Part Number=RK73H1ETTP1183F, Manufacturer="KOA Speer Electronics, Inc.", Supplier-1=Digikey
R119: library part RES_5.6K-0.1W-1%-0402, "5.6 kOhms ±1% 0.1W, 1/10W Chip Resistor 0402 (1005 Metric) Automotive AEC-Q200, Moisture Resistant Thick Film", Case/Package=0402, Manufacturer="KOA Speer Electronics, Inc.", Manufacturer Part Number=RK73H1ETTP5601F, Supplier-1=Digikey
R120: library part RES_12K-0.1W-1%-0402, "12 kOhms ±1% 0.1W, 1/10W Chip Resistor 0402 (1005 Metric) Anti-Sulfur Thin Film", Case/Package=0402, Manufacturer="Vishay Beyschlag/Draloric/BC Components", Manufacturer Part Number=MCS04020C1202FE000, Supplier-1=Digikey
R122: library part RES_51K-0.1W-1%-0402, "51 kOhms ±1% 0.1W, 1/10W Chip Resistor 0402 (1005 Metric) Automotive AEC-Q200 Thick Film", Case/Package=0402, Manufacturer="Panasonic Electronic Components", Manufacturer Part Number=ERJ-2RKF5102X, Supplier-1=Digikey
R123: library part RES_0.1R-0.1W-1%-0402, "100 mOhms ±1% 0.1W, 1/10W Chip Resistor 0402 (1005 Metric) Current Sense, Moisture Resistant Thick Film", Casse/Package=0402, Manufacturer="Samsung Electro-Mechanics", Manufacturer Part Number=RUT1005FR100CS, Supplier-1=Digikey
R129 R131: library part RES_300K-0.1W-1%-0402, "300 kOhms ±1% 0.1W, 1/10W Chip Resistor 0402 (1005 Metric) Automotive AEC-Q200 Thick Film", Case/Package=0402, Manufacturer="Panasonic Electronic Components", Manufacturer Part Number=ERJ-2RKF3003X, Supplier-1=Digikey
SW1 SW2 SW3: library part SW1_4982, "Tactile Switch 3x4x2mm SMD 2-Pin", Case/Package=SMD, Manufacturer=NA, Manufacturer Part Number=NA, Supplier-1=Sunrom
U1 U2: library part IC_RS512M32LZ4D2ANP-75BT, "LPDDR4/4X Package FBGA 200b Density 4Gbit~64Gbit Operating Temperature Range：-25~85℃ Speed：2667Mbps/3200Mbps/3733Mbps Voltage：VDD1/VDD2/VDDQ= 1.8 / 1.1 / 1.1 V（LPDDR4）VDD1/VDD2/VDDQ = 1.8 / 1.1 / 0.6 V（LPDDR4X）Approved Verification Platform：MTK、Spreadtrum", Case/Package="FBGA 200b", Manufacturer=RAYSON, Manufacturer Part Number=RS512M32LZ4D2ANP-75BT, Supplier-1=RAYSON
U3: library part IC_KLMAG2WEMB-B031, "16GB NAND Flash Memory", Case/Package=153-FBGA, Manufacturer="Samsung Electronics", Manufacturer Part Number=KLMAG2WEMB-B031, Supplier-1=NA
U4: library part REG_5.5V-0~5.1V-0.5A-2.55W-DFN-6, "Adjustable 5.5V 0.8V 500mA DFN-6 Linear Voltage Regulators RoHS", Alternate Part Number-1=NA, Case/Package=DFN-6, Manufacturer=STMicroelectronics, Supplier Part Number-1=C222094, Category=Regulators, Manufacturer Part Number=LD39050PUR, Number of Pins=6, Supplier-1=LCSC
U5: library part MOD_WF60-SMD, "Amp’ed RF Tech presents the WF60 WiFi dual / band module: 802.11abgn.", Alternate Part Number-1=NA, Case/Package=SMD, Manufacturer=Amp’ed, Category=Module, Manufacturer Part Number=WF60, Number of Pins=16, Supplier Part Number-1=WF60, Supplier-1=Arrow
U6: library part IC_TXB0108NMER, "Translation - Voltage Levels 8-Bit Bidirectional Voltage-Level Shifter with Auto Direction Sensing and +/-15-kV ESD Protect", Case/Package=NFBGA-20, Manufacturer="Texas Instruments", Manufacturer Part Number=TXB0108NMER, Supplier-1=Mouser
U7 U9: library part REG_1.8V-300mA-5.5V-SC70-5, "Linear Voltage Regulator IC 1 Output 300mA SC-70-5", Case/Package=SC70-5, Manufacturer="Richtek USA Inc.", Manufacturer Part Number=RT9193-18GU5, Supplier-1=Digikey
U8: library part IC_RK3399-FCBGA828, "RK3399 is a low power, high performance processor for computing, personal mobile.", Case/Package=FCBGA828, Manufacturer=Rockchip, Manufacturer Part Number=RK3399, Supplier-1=Rockchip
U10: library part IC_FUSB302MPX, "USB Controller USB 3.1 USB Interface 14-MLP (2.5x2.5)", Case/Package=14-MLP, Manufacturer="ON Semiconductor", Manufacturer Part Number=FUSB302MPX, Supplier-1=Digikey
U11: library part IC_RTL8211E-VB-CG, "Ethernet Transceivers 10/100/1000 Base-T PHY GMII, MII, RGMII 1.43V ~ 3.63V QFN-48_6x6x04P Ethernet ICs RoHS", Case/Package=QFN-48, Manufacturer="Realtek Semicon", Manufacturer Part Number=RTL8211E-VB-CG, Supplier-1=LCSC